# EAGLE board working (EAGLE 7.7.0)
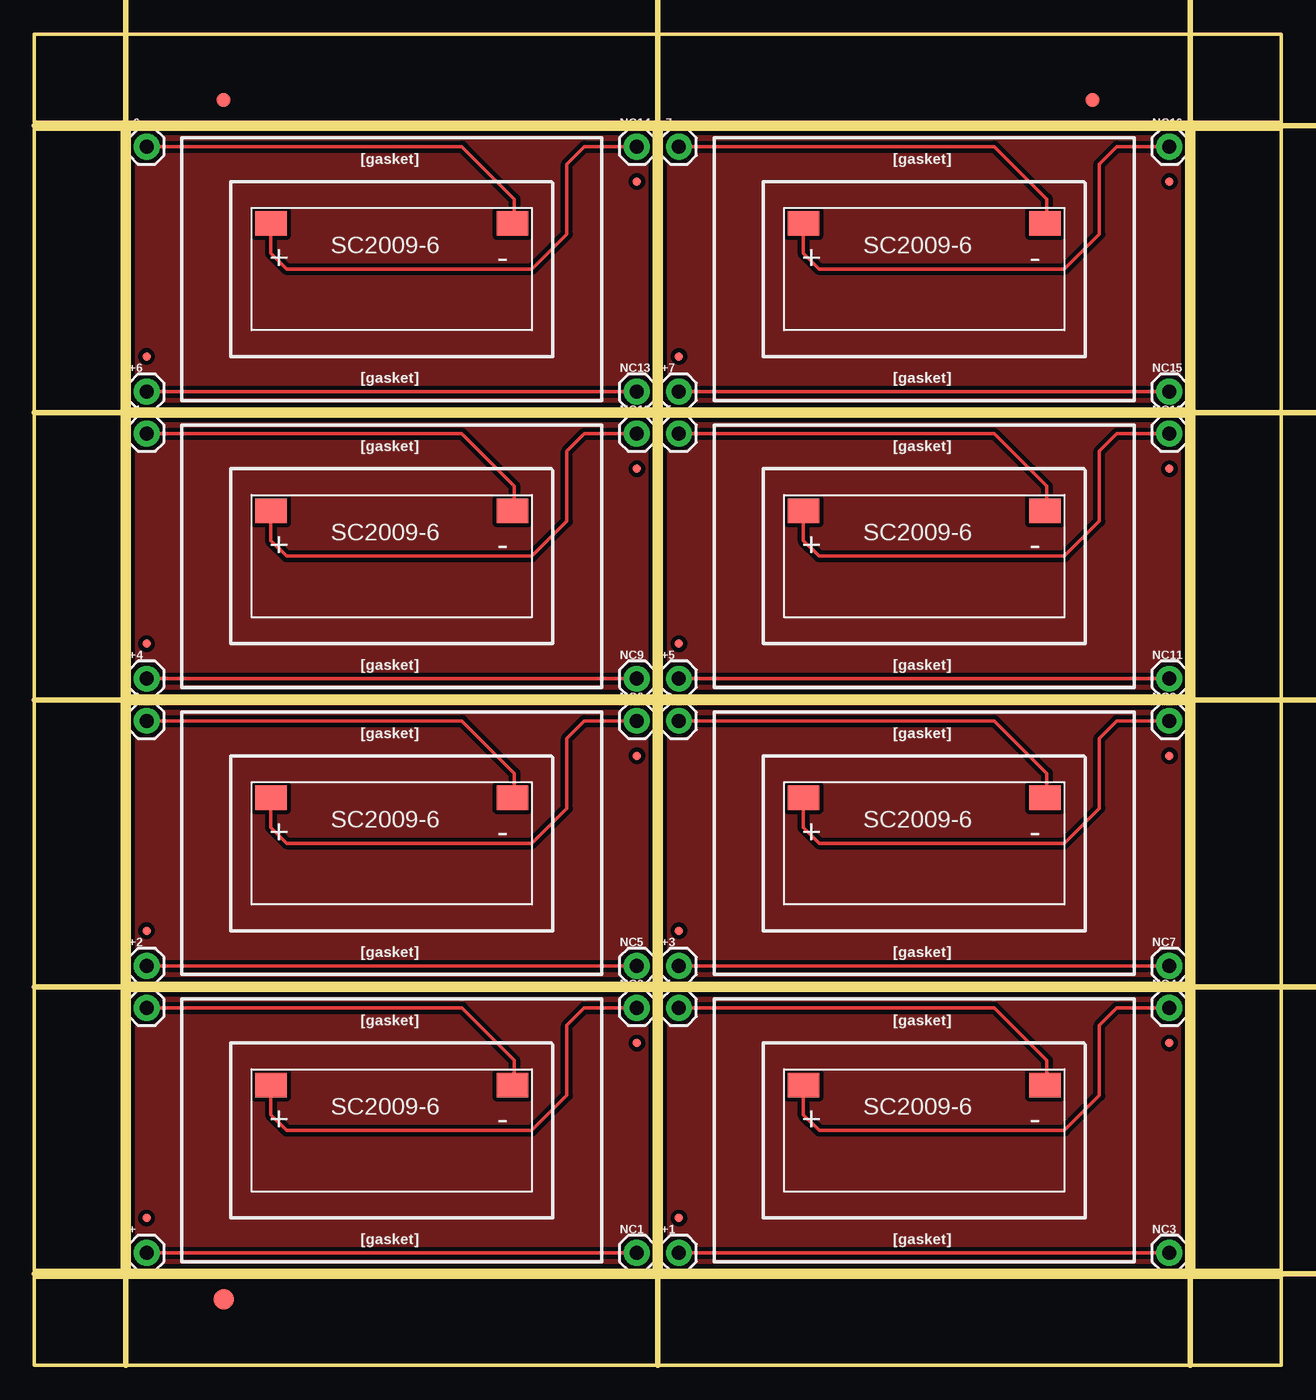
[diagram p0: board, top side]
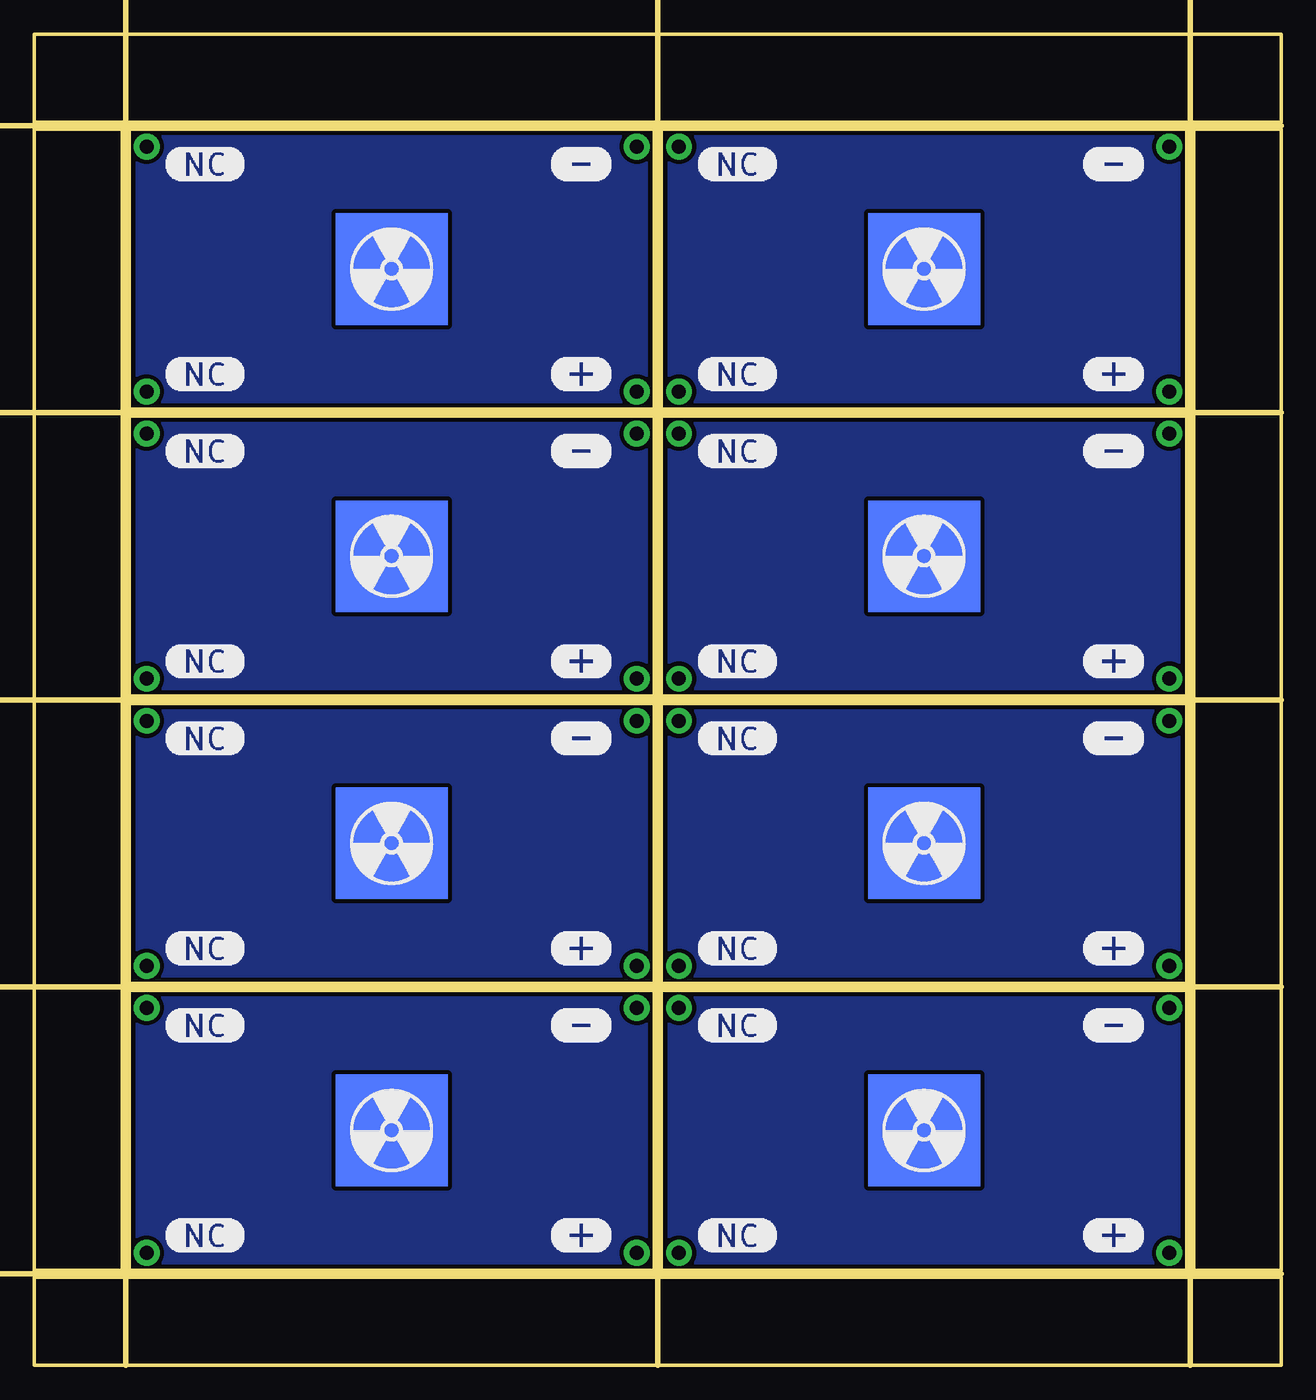
[diagram p1: board, bottom side, seen from below]

Size 90.42 x 96.52 mm. Coordinates in mm from the lower left corner, seen from the top.
Outline: 6.86,27.18 44.96,27.18 44.96,6.86 6.86,6.86 6.86,27.18
Outline: 45.47,27.18 83.57,27.18 83.57,6.86 45.47,6.86 45.47,27.18
Outline: 6.86,48.01 44.96,48.01 44.96,27.69 6.86,27.69 6.86,48.01
Outline: 45.47,48.01 83.57,48.01 83.57,27.69 45.47,27.69 45.47,48.01
Outline: 6.86,68.83 44.96,68.83 44.96,48.51 6.86,48.51 6.86,68.83
Outline: 45.47,68.83 83.57,68.83 83.57,48.51 45.47,48.51 45.47,68.83
Outline: 6.86,89.66 44.96,89.66 44.96,69.34 6.86,69.34 6.86,89.66
Outline: 45.47,89.66 83.57,89.66 83.57,69.34 45.47,69.34 45.47,89.66
Outline: 0,6.35 90.42,6.35 90.42,0 0,0 0,6.35
Outline: 84.07,89.66 90.42,89.66 90.42,6.86 84.07,6.86 84.07,89.66
Outline: 0,96.52 90.42,96.52 90.42,90.17 0,90.17 0,96.52
Outline: 0,89.66 6.35,89.66 6.35,6.86 0,6.86 0,89.66
Copper layers (1*16): Top 0.035mm / dielectric 1.5mm / Bottom 0.035mm
Design rules "SparkFun-2-layer-PCBWay-LIMIT": minimum track width 6mil, minimum drill 0.3mm, track to track 6mil, track to pad 6mil, pad to pad 6mil, via to via 6mil, smd to smd 6mil, copper to edge 6mil, drill to drill 6mil, minimum pad ring 7mil, minimum via ring 7mil, stop-mask expansion 4mil, vias tented up to drill 25mil, thermal gap 10mil
Milling: 8 lines

## Footprints (pad centres in the part's own frame; a part is rotated, then mirrored left to right if it is on the bottom)
1X01 = drill 1.016 pad 1.88: 1 0,0
FIDUCIAL-1X2 = smd 1 x 1: 1 0,0
FIDUCIAL-1.5X3 = smd 1.5 x 1.5: 1 0,0
FIDUCIAL-MICRO = smd 0.635 x 0.635: 1 0,0
20X9MM = smd 2.286 x 1.778: + -8.763,3.302; - 8.763,3.302

## Placement (x,y rotation side)
+  [1X01]  8.13,8.13 0 top
+1  [1X01]  46.74,8.13 0 top
+2  [1X01]  8.13,28.96 0 top
+3  [1X01]  46.74,28.96 0 top
+4  [1X01]  8.13,49.78 0 top
+5  [1X01]  46.74,49.78 0 top
+6  [1X01]  8.13,70.61 0 top
+7  [1X01]  46.74,70.61 0 top
-  [1X01]  8.13,25.91 0 top
-1  [1X01]  46.74,25.91 0 top
-2  [1X01]  8.13,46.74 0 top
-3  [1X01]  46.74,46.74 0 top
-4  [1X01]  8.13,67.56 0 top
-5  [1X01]  46.74,67.56 0 top
-6  [1X01]  8.13,88.39 0 top
-7  [1X01]  46.74,88.39 0 top
E$1  [FIDUCIAL-1X2]  13.72,91.76 0 top
E$2  [FIDUCIAL-1X2]  76.71,91.76 0 top
E$3  [FIDUCIAL-1.5X3]  13.72,4.76 0 top
FD1  FIDUCIALUFIDUCIAL  [FIDUCIAL-MICRO]  8.13,10.67 0 top
FD2  FIDUCIALUFIDUCIAL  [FIDUCIAL-MICRO]  43.69,23.37 0 top
FD3  FIDUCIALUFIDUCIAL  [FIDUCIAL-MICRO]  46.74,10.67 0 top
FD4  FIDUCIALUFIDUCIAL  [FIDUCIAL-MICRO]  82.3,23.37 0 top
FD5  FIDUCIALUFIDUCIAL  [FIDUCIAL-MICRO]  8.13,31.5 0 top
FD6  FIDUCIALUFIDUCIAL  [FIDUCIAL-MICRO]  43.69,44.2 0 top
FD7  FIDUCIALUFIDUCIAL  [FIDUCIAL-MICRO]  46.74,31.5 0 top
FD8  FIDUCIALUFIDUCIAL  [FIDUCIAL-MICRO]  82.3,44.2 0 top
FD9  FIDUCIALUFIDUCIAL  [FIDUCIAL-MICRO]  8.13,52.32 0 top
FD10  FIDUCIALUFIDUCIAL  [FIDUCIAL-MICRO]  43.69,65.02 0 top
FD11  FIDUCIALUFIDUCIAL  [FIDUCIAL-MICRO]  46.74,52.32 0 top
FD12  FIDUCIALUFIDUCIAL  [FIDUCIAL-MICRO]  82.3,65.02 0 top
FD13  FIDUCIALUFIDUCIAL  [FIDUCIAL-MICRO]  8.13,73.15 0 top
FD14  FIDUCIALUFIDUCIAL  [FIDUCIAL-MICRO]  43.69,85.85 0 top
FD15  FIDUCIALUFIDUCIAL  [FIDUCIAL-MICRO]  46.74,73.15 0 top
FD16  FIDUCIALUFIDUCIAL  [FIDUCIAL-MICRO]  82.3,85.85 0 top
NC1  [1X01]  43.69,8.13 0 top
NC2  [1X01]  43.69,25.91 0 top
NC3  [1X01]  82.3,8.13 0 top
NC4  [1X01]  82.3,25.91 0 top
NC5  [1X01]  43.69,28.96 0 top
NC6  [1X01]  43.69,46.74 0 top
NC7  [1X01]  82.3,28.96 0 top
NC8  [1X01]  82.3,46.74 0 top
NC9  [1X01]  43.69,49.78 0 top
NC10  [1X01]  43.69,67.56 0 top
NC11  [1X01]  82.3,49.78 0 top
NC12  [1X01]  82.3,67.56 0 top
NC13  [1X01]  43.69,70.61 0 top
NC14  [1X01]  43.69,88.39 0 top
NC15  [1X01]  82.3,70.61 0 top
NC16  [1X01]  82.3,88.39 0 top
U$1  9X20_AMORPHOUS_PV  [20X9MM]  25.91,17.02 0 top
U$2  [#0]  14.48,9.4 0 bottom
U$3  [#1]  14.48,24.64 0 bottom
U$4  [NC0]  42.42,24.64 0 bottom
U$5  [RADIATION_TREFOIL_SIGN_SYMBOL_WARNING_SIGN_SYMBOL_CLASSIC_ROUND_STICKER#RCB13028D4AAD443CA303E61808FDC84C_V9WAF_8BYVR_540#JPG]  25.91,17.02 0 bottom
U$6  [NC0]  42.42,9.4 0 bottom
U$7  9X20_AMORPHOUS_PV  [20X9MM]  64.52,17.02 0 top
U$8  [#0]  53.09,9.4 0 bottom
U$9  [#1]  53.09,24.64 0 bottom
U$10  [NC0]  81.03,24.64 0 bottom
U$11  [RADIATION_TREFOIL_SIGN_SYMBOL_WARNING_SIGN_SYMBOL_CLASSIC_ROUND_STICKER#RCB13028D4AAD443CA303E61808FDC84C_V9WAF_8BYVR_540#JPG]  64.52,17.02 0 bottom
U$12  [NC0]  81.03,9.4 0 bottom
U$13  9X20_AMORPHOUS_PV  [20X9MM]  25.91,37.85 0 top
U$14  [#0]  14.48,30.23 0 bottom
U$15  [#1]  14.48,45.47 0 bottom
U$16  [NC0]  42.42,45.47 0 bottom
U$17  [RADIATION_TREFOIL_SIGN_SYMBOL_WARNING_SIGN_SYMBOL_CLASSIC_ROUND_STICKER#RCB13028D4AAD443CA303E61808FDC84C_V9WAF_8BYVR_540#JPG]  25.91,37.85 0 bottom
U$18  [NC0]  42.42,30.23 0 bottom
U$19  9X20_AMORPHOUS_PV  [20X9MM]  64.52,37.85 0 top
U$20  [#0]  53.09,30.23 0 bottom
U$21  [#1]  53.09,45.47 0 bottom
U$22  [NC0]  81.03,45.47 0 bottom
U$23  [RADIATION_TREFOIL_SIGN_SYMBOL_WARNING_SIGN_SYMBOL_CLASSIC_ROUND_STICKER#RCB13028D4AAD443CA303E61808FDC84C_V9WAF_8BYVR_540#JPG]  64.52,37.85 0 bottom
U$24  [NC0]  81.03,30.23 0 bottom
U$25  9X20_AMORPHOUS_PV  [20X9MM]  25.91,58.67 0 top
U$26  [#0]  14.48,51.05 0 bottom
U$27  [#1]  14.48,66.29 0 bottom
U$28  [NC0]  42.42,66.29 0 bottom
U$29  [RADIATION_TREFOIL_SIGN_SYMBOL_WARNING_SIGN_SYMBOL_CLASSIC_ROUND_STICKER#RCB13028D4AAD443CA303E61808FDC84C_V9WAF_8BYVR_540#JPG]  25.91,58.67 0 bottom
U$30  [NC0]  42.42,51.05 0 bottom
U$31  9X20_AMORPHOUS_PV  [20X9MM]  64.52,58.67 0 top
U$32  [#0]  53.09,51.05 0 bottom
U$33  [#1]  53.09,66.29 0 bottom
U$34  [NC0]  81.03,66.29 0 bottom
U$35  [RADIATION_TREFOIL_SIGN_SYMBOL_WARNING_SIGN_SYMBOL_CLASSIC_ROUND_STICKER#RCB13028D4AAD443CA303E61808FDC84C_V9WAF_8BYVR_540#JPG]  64.52,58.67 0 bottom
U$36  [NC0]  81.03,51.05 0 bottom
U$37  9X20_AMORPHOUS_PV  [20X9MM]  25.91,79.5 0 top
U$38  [#0]  14.48,71.88 0 bottom
U$39  [#1]  14.48,87.12 0 bottom
U$40  [NC0]  42.42,87.12 0 bottom
U$41  [RADIATION_TREFOIL_SIGN_SYMBOL_WARNING_SIGN_SYMBOL_CLASSIC_ROUND_STICKER#RCB13028D4AAD443CA303E61808FDC84C_V9WAF_8BYVR_540#JPG]  25.91,79.5 0 bottom
U$42  [NC0]  42.42,71.88 0 bottom
U$43  9X20_AMORPHOUS_PV  [20X9MM]  64.52,79.5 0 top
U$44  [#0]  53.09,71.88 0 bottom
U$45  [#1]  53.09,87.12 0 bottom
U$46  [NC0]  81.03,87.12 0 bottom
U$47  [RADIATION_TREFOIL_SIGN_SYMBOL_WARNING_SIGN_SYMBOL_CLASSIC_ROUND_STICKER#RCB13028D4AAD443CA303E61808FDC84C_V9WAF_8BYVR_540#JPG]  64.52,79.5 0 bottom
U$48  [NC0]  81.03,71.88 0 bottom

## Library data of the parts
+ +1-+7 - -1--7 NC1-NC16 = SparkFun-Connectors
E$1 E$2 FD1-FD16 = SparkFun-Aesthetics
E$3 = SparkFun-Retired
U$1 U$7 U$13 U$19 U$25 U$31 U$37 U$43 = SparkX
U$2 U$3 U$8 U$9 U$14 U$15 U$20 U$21 U$26 U$27 U$32 U$33 U$38 U$39 U$44 U$45 = buzzard_labels (9)
U$4 U$6 U$10 U$12 U$16 U$18 U$22 U$24 U$28 U$30 U$34 U$36 U$40 U$42 U$46 U$48 = buzzard_labels (11)
U$5 U$11 U$17 U$23 U$29 U$35 U$41 U$47 = radiation_trefoil_sign_symbol_warning_sign_symbol_classic_round_sticker#rcb13028d4aad443ca303e61808fdc84c_v9waf_8byvr_540#jpg (2)

## Nets
N$1: +.1 NC1.1
N$2: -.1 U$1.-
N$3: NC2.1 U$1.+
N$8: +1.1 NC3.1
N$9: -1.1 U$7.-
N$10: NC4.1 U$7.+
N$13: +2.1 NC5.1
N$14: -2.1 U$13.-
N$15: NC6.1 U$13.+
N$18: +3.1 NC7.1
N$19: -3.1 U$19.-
N$20: NC8.1 U$19.+
N$23: +4.1 NC9.1
N$24: -4.1 U$25.-
N$25: NC10.1 U$25.+
N$28: +5.1 NC11.1
N$29: -5.1 U$31.-
N$30: NC12.1 U$31.+
N$33: +6.1 NC13.1
N$34: -6.1 U$37.-
N$35: NC14.1 U$37.+
N$38: +7.1 NC15.1
N$39: -7.1 U$43.-
N$40: NC16.1 U$43.+

## Tracks (layer width: path | path; a pad name or v marks a point on that pad's centre or on a via)
N$1
  Top 0.254: +.1 NC1.1
N$2
  Top 0.254: -.1 30.99,25.91 34.8,22.1 34.8,20.45 U$1.-
N$3
  Top 0.254: U$1.+ 17.14,18.16 18.29,17.02 36.07,17.02 38.61,19.56 38.61,24.64 39.88,25.91 NC2.1
N$4
  pour Top (isolate 0.305): 45.47,27.18 83.57,27.18 83.57,6.86 45.47,6.86
N$5
  pour Bottom (isolate 0.305): 45.47,27.18 83.57,27.18 83.57,6.86 45.47,6.86
N$6
  pour Top (isolate 0.305): 6.86,27.18 44.96,27.18 44.96,6.86 6.86,6.86
N$7
  pour Bottom (isolate 0.305): 6.86,27.18 44.96,27.18 44.96,6.86 6.86,6.86
N$8
  Top 0.254: +1.1 NC3.1
N$9
  Top 0.254: -1.1 69.6,25.91 73.41,22.1 73.41,20.45 U$7.-
N$10
  Top 0.254: U$7.+ 55.75,18.16 56.9,17.02 74.68,17.02 77.22,19.56 77.22,24.64 78.49,25.91 NC4.1
N$11
  pour Top (isolate 0.305): 6.86,48.01 44.96,48.01 44.96,27.69 6.86,27.69
N$12
  pour Bottom (isolate 0.305): 6.86,48.01 44.96,48.01 44.96,27.69 6.86,27.69
N$13
  Top 0.254: +2.1 NC5.1
N$14
  Top 0.254: -2.1 30.99,46.74 34.8,42.93 34.8,41.27 U$13.-
N$15
  Top 0.254: U$13.+ 17.14,38.99 18.29,37.85 36.07,37.85 38.61,40.39 38.61,45.47 39.88,46.74 NC6.1
N$16
  pour Top (isolate 0.305): 45.47,48.01 83.57,48.01 83.57,27.69 45.47,27.69
N$17
  pour Bottom (isolate 0.305): 45.47,48.01 83.57,48.01 83.57,27.69 45.47,27.69
N$18
  Top 0.254: +3.1 NC7.1
N$19
  Top 0.254: -3.1 69.6,46.74 73.41,42.93 73.41,41.27 U$19.-
N$20
  Top 0.254: U$19.+ 55.75,38.99 56.9,37.85 74.68,37.85 77.22,40.39 77.22,45.47 78.49,46.74 NC8.1
N$21
  pour Top (isolate 0.305): 6.86,68.83 44.96,68.83 44.96,48.51 6.86,48.51
N$22
  pour Bottom (isolate 0.305): 6.86,68.83 44.96,68.83 44.96,48.51 6.86,48.51
N$23
  Top 0.254: +4.1 NC9.1
N$24
  Top 0.254: -4.1 30.99,67.56 34.8,63.75 34.8,62.1 U$25.-
N$25
  Top 0.254: U$25.+ 17.14,59.82 18.29,58.67 36.07,58.67 38.61,61.21 38.61,66.29 39.88,67.56 NC10.1
N$26
  pour Top (isolate 0.305): 45.47,68.83 83.57,68.83 83.57,48.51 45.47,48.51
N$27
  pour Bottom (isolate 0.305): 45.47,68.83 83.57,68.83 83.57,48.51 45.47,48.51
N$28
  Top 0.254: +5.1 NC11.1
N$29
  Top 0.254: -5.1 69.6,67.56 73.41,63.75 73.41,62.1 U$31.-
N$30
  Top 0.254: U$31.+ 55.75,59.82 56.9,58.67 74.68,58.67 77.22,61.21 77.22,66.29 78.49,67.56 NC12.1
N$31
  pour Top (isolate 0.305): 6.86,89.66 44.96,89.66 44.96,69.34 6.86,69.34
N$32
  pour Bottom (isolate 0.305): 6.86,89.66 44.96,89.66 44.96,69.34 6.86,69.34
N$33
  Top 0.254: +6.1 NC13.1
N$34
  Top 0.254: -6.1 30.99,88.39 34.8,84.58 34.8,82.93 U$37.-
N$35
  Top 0.254: U$37.+ 17.14,80.65 18.29,79.5 36.07,79.5 38.61,82.04 38.61,87.12 39.88,88.39 NC14.1
N$36
  pour Top (isolate 0.305): 45.47,89.66 83.57,89.66 83.57,69.34 45.47,69.34
N$37
  pour Bottom (isolate 0.305): 45.47,89.66 83.57,89.66 83.57,69.34 45.47,69.34
N$38
  Top 0.254: +7.1 NC15.1
N$39
  Top 0.254: -7.1 69.6,88.39 73.41,84.58 73.41,82.93 U$43.-
N$40
  Top 0.254: U$43.+ 55.75,80.65 56.9,79.5 74.68,79.5 77.22,82.04 77.22,87.12 78.49,88.39 NC16.1

## Text on the board
tPlace: [gasket] | [gasket] | [gasket] | [gasket] | [gasket] | [gasket] | [gasket] | [gasket] | [gasket] | [gasket] | [gasket] | [gasket] | [gasket] | [gasket] | [gasket] | [gasket]
Milling: v-score | v-score | v-score | v-score | v-score | v-score | v-score | v-score